# EAGLE board datalogger (EAGLE 7.6.0)
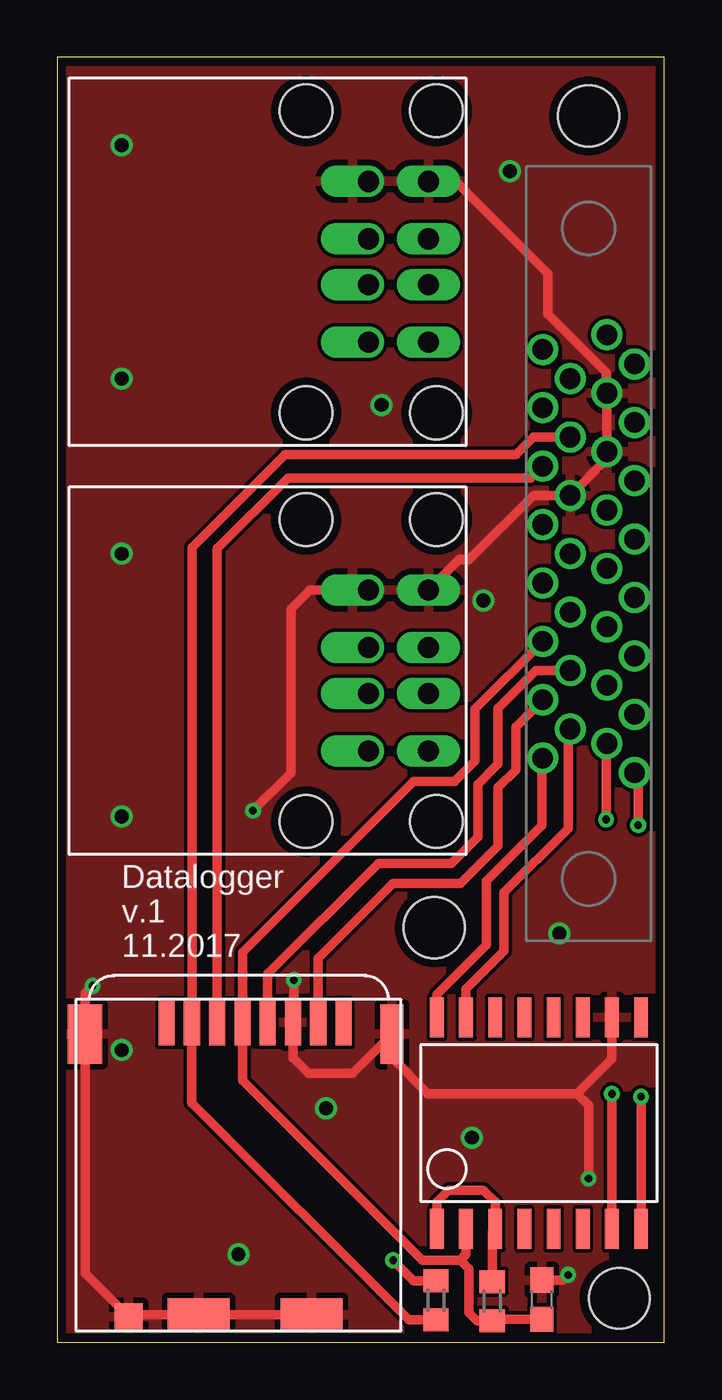
[diagram p0: board, top side]
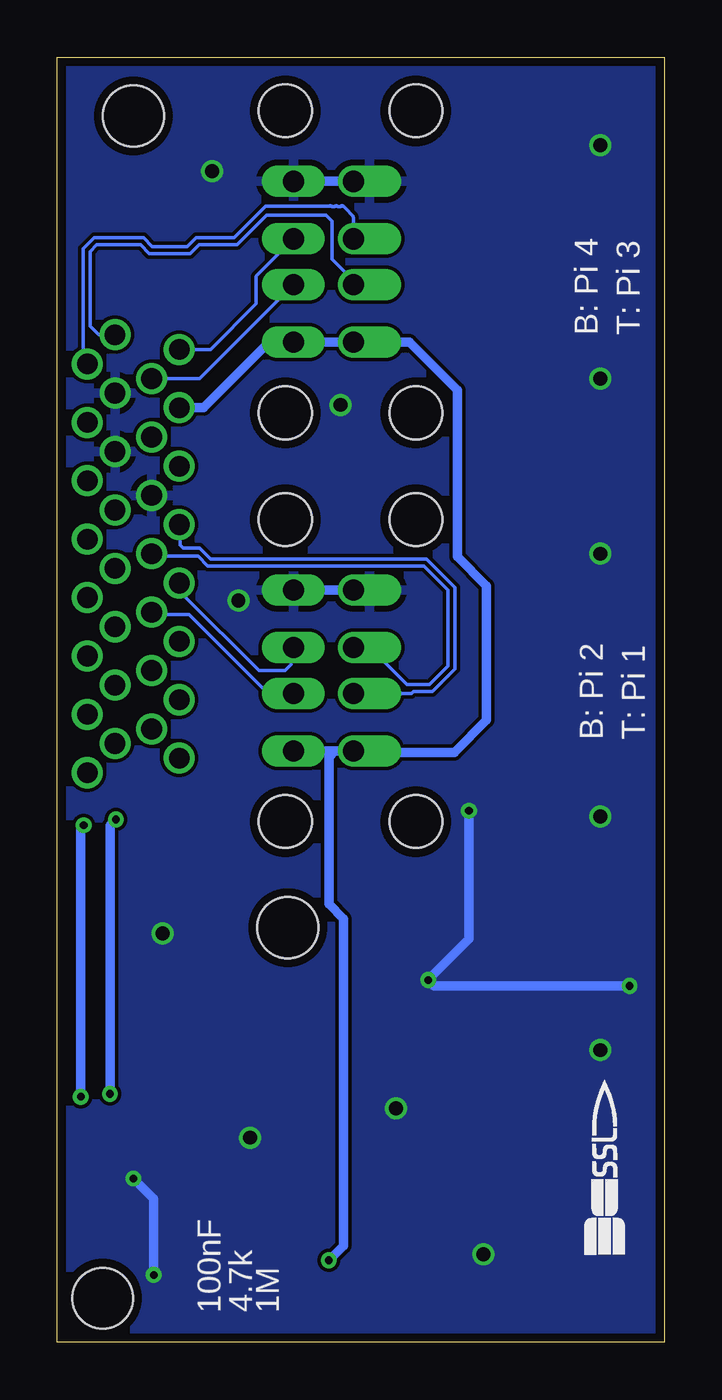
[diagram p1: board, bottom side, seen from below]

Size 26.42 x 55.88 mm. Coordinates in mm from the lower left corner, seen from the top.
Outline: 0,0 26.42,0 26.42,55.88 0,55.88 0,0
Copper layers (1*16): Top 0.0356mm / dielectric 1.5011mm / Bottom 0.0356mm
Design rules "OshPark *": minimum track width 6mil, minimum drill 13mil, track to track 6mil, track to pad 6mil, pad to pad 6mil, via to via 6mil, smd to smd 6mil, copper to edge 15mil, drill to drill 6mil, minimum pad ring 7mil, minimum via ring 7mil, stop-mask expansion 3mil, vias tented up to drill 25mil, thermal gap 10mil
Net classes: 1 diff_pair: width 0.406 mm
Holes 2.65 mm at 16.4,18.02 23.11,53.34 24.45,1.9

## Footprints (pad centres in the part's own frame; a part is rotated, then mirrored left to right if it is on the bottom)
C0603 = smd 1.1 x 1: 1 -0.85,0; 2 0.85,0
ZKN-31-J30 = drill 0.9: 1 -9.525,-2; 2 -8.255,-0.8; 3 -6.985,-2; 4 -5.715,-0.8; 5 -4.445,-2; 6 -3.175,-0.8; 7 -1.905,-2; 8 -0.635,-0.8; 9 0.635,-2; 10 1.905,-0.8; 11 3.175,-2; 12 4.445,-0.8; 13 5.715,-2; 14 6.985,-0.8; 15 8.255,-2; 16 9.525,-0.8; 17 -8.89,2; 18 -7.62,0.8; 19 -6.35,2; 20 -5.08,0.8; 21 -3.81,2; 22 -2.54,0.8; 23 -1.27,2; 24 0,0.8; 25 1.27,2; 26 2.54,0.8; 27 3.81,2; 28 5.08,0.8; 29 6.35,2; 30 7.62,0.8; 31 8.89,2
R0603 = smd 1 x 1.1: 1 -0.85,0; 2 0.85,0
SOP2-16 = smd 0.6 x 1.75: 1 -4.445,-4.6; 2 -3.175,-4.6; 3 -1.905,-4.6; 4 -0.635,-4.6; 5 0.635,-4.6; 6 1.905,-4.6; 7 3.175,-4.6; 8 4.445,-4.6; 9 4.445,4.6; 10 3.175,4.6; 11 1.905,4.6; 12 0.635,4.6; 13 -0.635,4.6; 14 -1.905,4.6; 15 -3.175,4.6; 16 -4.445,4.6
MICRO_SD_HINGED = smd 0.7 x 2: CD -1.1,-13.4; CLK -4.4,-13.4; CMD -2.2,-13.4; DAT0 -6.6,-13.4; DAT1 -7.7,-13.4; DAT2 0,-13.4; VDD -3.3,-13.4; VSS -5.5,-13.4 | smd 2.7 x 1.4: CD1 -1.4,-0.7; GND3 -6.3,-0.7 | smd 1.5 x 2.6: GND1 3.55,-12.9 | smd 1.2 x 1.2: GND2 1.65,-0.6 | smd 1 x 2.6: GND4 -9.8,-12.9
USB_A = drill 0.92 long: DATA+1 -1,7.005; DATA-1 1,7.005; GND1 -3.5,7.005; VCC1 3.5,7.005 | drill 0.92 offset: DATA+2 -1,4.385; DATA-2 1,4.385; GND2 -3.5,4.385; VCC2 3.5,4.385 | hole 2.3: -6.57,7.355; -6.57,1.675; 6.57,7.355; 6.57,1.675

## Placement (x,y rotation side)
C1  100nF  [C0603]  21.08,1.84 90 top
CONNECTOR  J30J-31J30  [ZKN-31-J30]  23.11,34.29 90 top
R1  4.7k  [R0603]  18.92,1.78 90 top
R2  [R0603]  16.47,1.82 90 top
U1  MT25QL01GBBB8ESF-0AAT  [SOP2-16]  20.95,9.53 0 top
U$1  MICRO_SD  [MICRO_SD_HINGED]  4.75,0.5 180 top
U$2  USB_A  [USB_A]  9.14,29.21 270 top
U$3  USB_A  [USB_A]  9.14,46.99 270 top
U$4  SSL.3IN_SILK  [SSL_SILK_.3IN]  3.84,3.81 0 bottom

## Library data of the parts
C1 R1 R2 = resistor
CONNECTOR = CM_J30J
U1 = NR_IC
U$1-U$3 = NR_connectors
U$4 = images

## Nets
+3V3: C1.1 CONNECTOR.21 R1.1 U1.2 U$1.VDD
+5V: CONNECTOR.29 R2.2 U$2.VCC1 U$2.VCC2 U$3.VCC1 U$3.VCC2
DATA1_N: CONNECTOR.22 U$2.DATA-1
DATA1_P: CONNECTOR.23 U$2.DATA+1
DATA2_N: CONNECTOR.25 U$2.DATA-2
DATA2_P: CONNECTOR.24 U$2.DATA+2
DATA3_N: CONNECTOR.30 U$3.DATA-1
DATA3_P: CONNECTOR.31 U$3.DATA+1
DATA4_N: CONNECTOR.16 U$3.DATA-2
DATA4_P: CONNECTOR.15 U$3.DATA+2
GND: C1.2 CONNECTOR.12 CONNECTOR.14 CONNECTOR.26 U1.10 U$1.CD1 U$1.GND1 U$1.GND2 U$1.GND3 U$1.GND4 U$1.VSS U$2.GND1 U$2.GND2 U$3.GND1 U$3.GND2
MISO_FLASH: CONNECTOR.1 U1.8
MISO_STAR: CONNECTOR.27 U$1.CMD
MOSI_FLASH: CONNECTOR.18 U1.15
MOSI_STAR: CONNECTOR.19 U$1.DAT0
N$1: R1.2 U1.1 U1.3
N$2: CONNECTOR.3
N$3: CONNECTOR.4
N$4: CONNECTOR.5
N$5: CONNECTOR.6
N$6: CONNECTOR.7
N$7: CONNECTOR.8
N$8: CONNECTOR.9
N$9: CONNECTOR.10
N$10: CONNECTOR.11
N$12: CONNECTOR.13
PB23: CONNECTOR.2 U1.7
SCK_FLASH: CONNECTOR.17 U1.16
SCK_STAR: CONNECTOR.20 U$1.CLK
SD_STAR: CONNECTOR.28 R2.1 U$1.CD

## Tracks (layer width: path | path; a pad name or v marks a point on that pad's centre or on a via)
+3V3
  Top 0.406: 17.53,3.56 15.88,3.56 8.05,11.38 U$1.VDD 8.05,16.94 15.49,24.38 17.27,24.38 18.16,25.27 18.16,27.53 CONNECTOR.21 | 17.53,3.56 17.78,3.81 U1.2 | 17.53,3.56 17.91,3.18 17.91,1.27 18.25,0.93 R1.1 18.99,0.99 C1.1
+5V  (via drill 0.33)
  Top 0.406: R2.2 15.5,2.67 v14.61,3.56
  Bottom 0.406: CONNECTOR.29 20.07,40.64 17.22,43.49 U$3.VCC1 U$3.VCC2 11.11,43.49 9.02,41.4 9.02,34.16 7.75,32.89 7.75,27.05 9.14,25.65 13.47,25.65 U$2.VCC2 14.35,25.71 | U$2.VCC1 14.35,25.71 | 14.35,25.71 14.61,25.46 14.61,19.05 13.97,18.41 13.97,4.19 v14.61,3.56
DATA1_N
  Bottom 0.152: CONNECTOR.22 22.21,31.64 20.68,31.64 17.25,28.21 U$2.DATA-1
DATA1_P
  Bottom 0.152: CONNECTOR.23 21.11,32.51 20.95,32.51 17.65,29.21 16.51,29.21 16.26,29.46 16.26,30.1 U$2.DATA+1
DATA2_N
  Bottom 0.152: U$2.DATA-2 11.01,28.21 10.92,28.3 10.1,28.3 9.12,29.27 9.12,32.83 10.35,34.06 19.75,34.06 20.23,34.54 20.95,34.54 21.08,34.67 21.08,35.53 CONNECTOR.25
DATA2_P
  Bottom 0.152: U$2.DATA+2 12.81,30.21 arc90 12.7,30.1 arc-90 12.57,29.97 arc90 12.45,29.84 arc-90 12.32,29.72 11.2,28.6 10.22,28.6 9.42,29.4 9.42,32.7 10.48,33.76 19.88,33.76 20.3,34.18 22.21,34.18 CONNECTOR.24
DATA3_N
  Bottom 0.152: U$3.DATA-1 20.23,41.91 CONNECTOR.30
DATA3_P
  Bottom 0.152: CONNECTOR.31 19.76,43.18 17.78,45.16 17.78,46.35 17.76,46.38 U$3.DATA+1
DATA4_N
  Bottom 0.152: U$3.DATA-2 13.53,46.17 14.48,47.12 14.48,48.77 14.73,49.02 17.31,49.02 18.61,47.73 20.26,47.73 20.64,47.35 22.41,47.35 22.8,47.73 24.7,47.73 24.99,47.44 24.99,44.2 24.61,43.81 CONNECTOR.16
DATA4_P
  Bottom 0.152: U$3.DATA+2 13.53,48.84 arc-36 13.59,49.02 13.84,49.28 arc-19 13.97,49.4 arc-71 14.1,49.4 arc71 14.22,49.4 arc-71 14.35,49.4 arc71 14.48,49.4 arc-71 14.61,49.4 17.36,49.4 18.73,48.03 20.38,48.03 20.76,47.65 22.29,47.65 22.67,48.03 24.83,48.03 25.3,47.56 25.3,42.55 CONNECTOR.15
GND  (via drill 0.33, 0.6)
  Top 0.406: 21.3,2.48 C1.2 22,2.69 v22.23,2.92 | U$1.VSS 10.25,12.36 10.92,11.68 12.84,11.68 U$1.GND4 14.55,12.37 16.13,10.79 22.61,10.79 | U$1.VSS 10.34,13.89 10.41,13.97 | 22.61,10.79 24.13,12.32 U1.10 | U$1.GND3 U$1.CD1 3.2,1.2 U$1.GND2 1.2,3 U$1.GND1 1.2,15.17 v1.52,15.49 | U$3.GND1 17.33,50.49 21.34,46.48 21.34,44.7 23.88,42.16 23.88,41.31 CONNECTOR.14 CONNECTOR.12 23.91,38.43 CONNECTOR.26 20.7,36.83 17.91,34.04 17.48,34.04 U$2.GND1 | U$2.GND2 10.99,32.71 10.16,31.88 10.16,24.77 v8.51,23.11 | v10.29,15.75 10.29,13.93 U$1.VSS | 22.61,10.79 23.11,10.29 v23.11,7.11
  Bottom 0.406: U$3.GND2 U$3.GND1 | U$2.GND2 U$2.GND1 | v8.51,23.11 8.51,17.53 v10.29,15.75 10.03,15.49 v1.52,15.49 | v22.23,2.92 22.23,6.22 v23.11,7.11
  other vias: 2.79,52.07 2.79,41.91 2.79,34.29 14.1,40.77 19.69,50.93 18.54,32.26 21.84,17.78 2.79,22.86 2.79,12.7 11.68,10.16 7.87,3.81 18.03,8.89
  pour Top: -2.29,58.42 29.46,58.42 29.46,-3.81 -2.29,-3.81
  pour Bottom: -1.02,57.15 28.19,57.15 28.19,-2.54 -1.02,-2.54
MISO_FLASH  (via drill 0.33)
  Top 0.406: U1.8 v25.4,10.67 | v25.27,22.48 25.27,24.61 CONNECTOR.1
  Bottom 0.406: v25.4,10.67 25.4,22.35 v25.27,22.48
MISO_STAR
  Top 0.406: U$1.CMD 6.95,34.51 10.03,37.59 20.61,37.59 CONNECTOR.27
MOSI_FLASH
  Top 0.406: U1.15 17.78,15.37 19.43,17.02 19.43,19.56 22.23,22.35 22.23,26.58 CONNECTOR.18
MOSI_STAR
  Top 0.406: U$1.DAT0 11.35,16.68 14.61,19.94 17.53,19.94 19.18,21.59 19.18,24.13 19.94,24.89 19.94,26.77 CONNECTOR.19
N$1
  Top 0.406: U1.1 16.51,6.1 17.02,6.6 18.54,6.6 19.05,6.1 U1.3 18.92,4.8 R1.2
PB23  (via drill 0.33)
  Top 0.406: U1.7 v24.13,10.79 | v23.88,22.73 23.88,26 CONNECTOR.2
  Bottom 0.406: v24.13,10.79 24.13,22.48 v23.88,22.73
SCK_FLASH
  Top 0.406: CONNECTOR.17 21.08,25.37 21.08,22.48 18.67,20.07 18.67,17.27 16.51,15.11 U1.16
SCK_STAR
  Top 0.406: U$1.CLK 9.15,16.01 13.97,20.83 17.14,20.83 18.29,21.97 18.29,24.26 19.18,25.15 19.18,27.56 20.83,29.21 CONNECTOR.20
SD_STAR
  Top 0.406: R2.1 15.29,0.97 5.84,10.41 5.84,13.89 U$1.CD 5.85,34.55 9.91,38.61 19.94,38.61 20.7,39.37 CONNECTOR.28

## Text on the board
tPlace: Datalogger | v.1 | 11.2017
bPlace: T: Pi 3 | B: Pi 4 | T: Pi 1 | B: Pi 2 | 1M | 4.7k | 100nF